# Altium PCB 数字电路.PcbDoc
Units mil, origin at the board's own origin, x right, y up, seen from the top; angles counter-clockwise.
Board outline 3550 x 3550 mil, 2 copper layers (Top Layer, Bottom Layer); 23 components, 13 nets, 137 pads, 0 vias.
Unrouted connection lines stored in the file: 47.
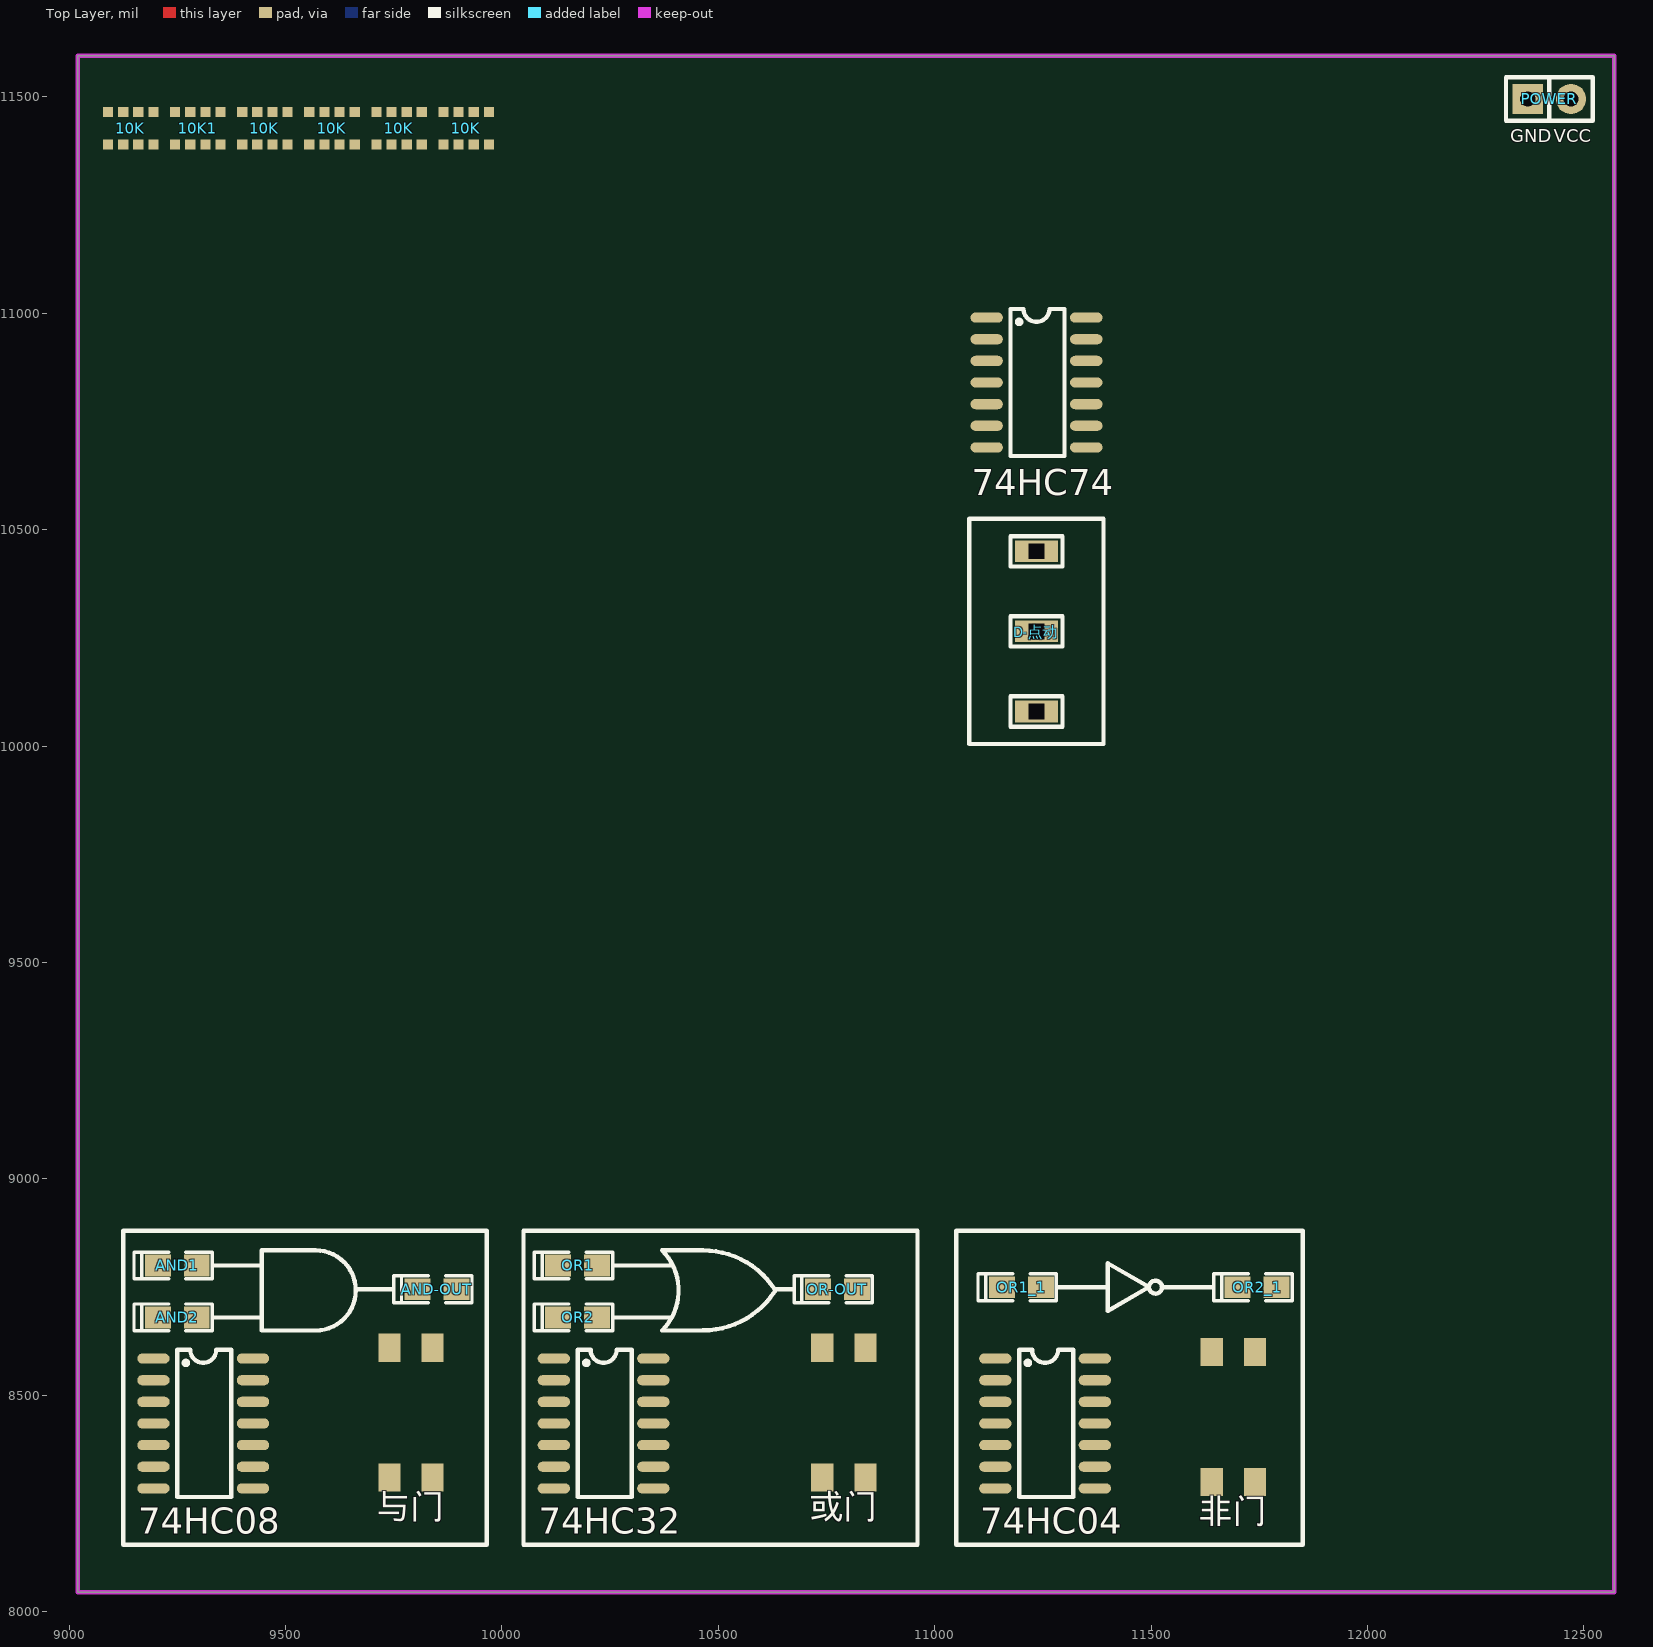
[diagram p0: Top Layer view]
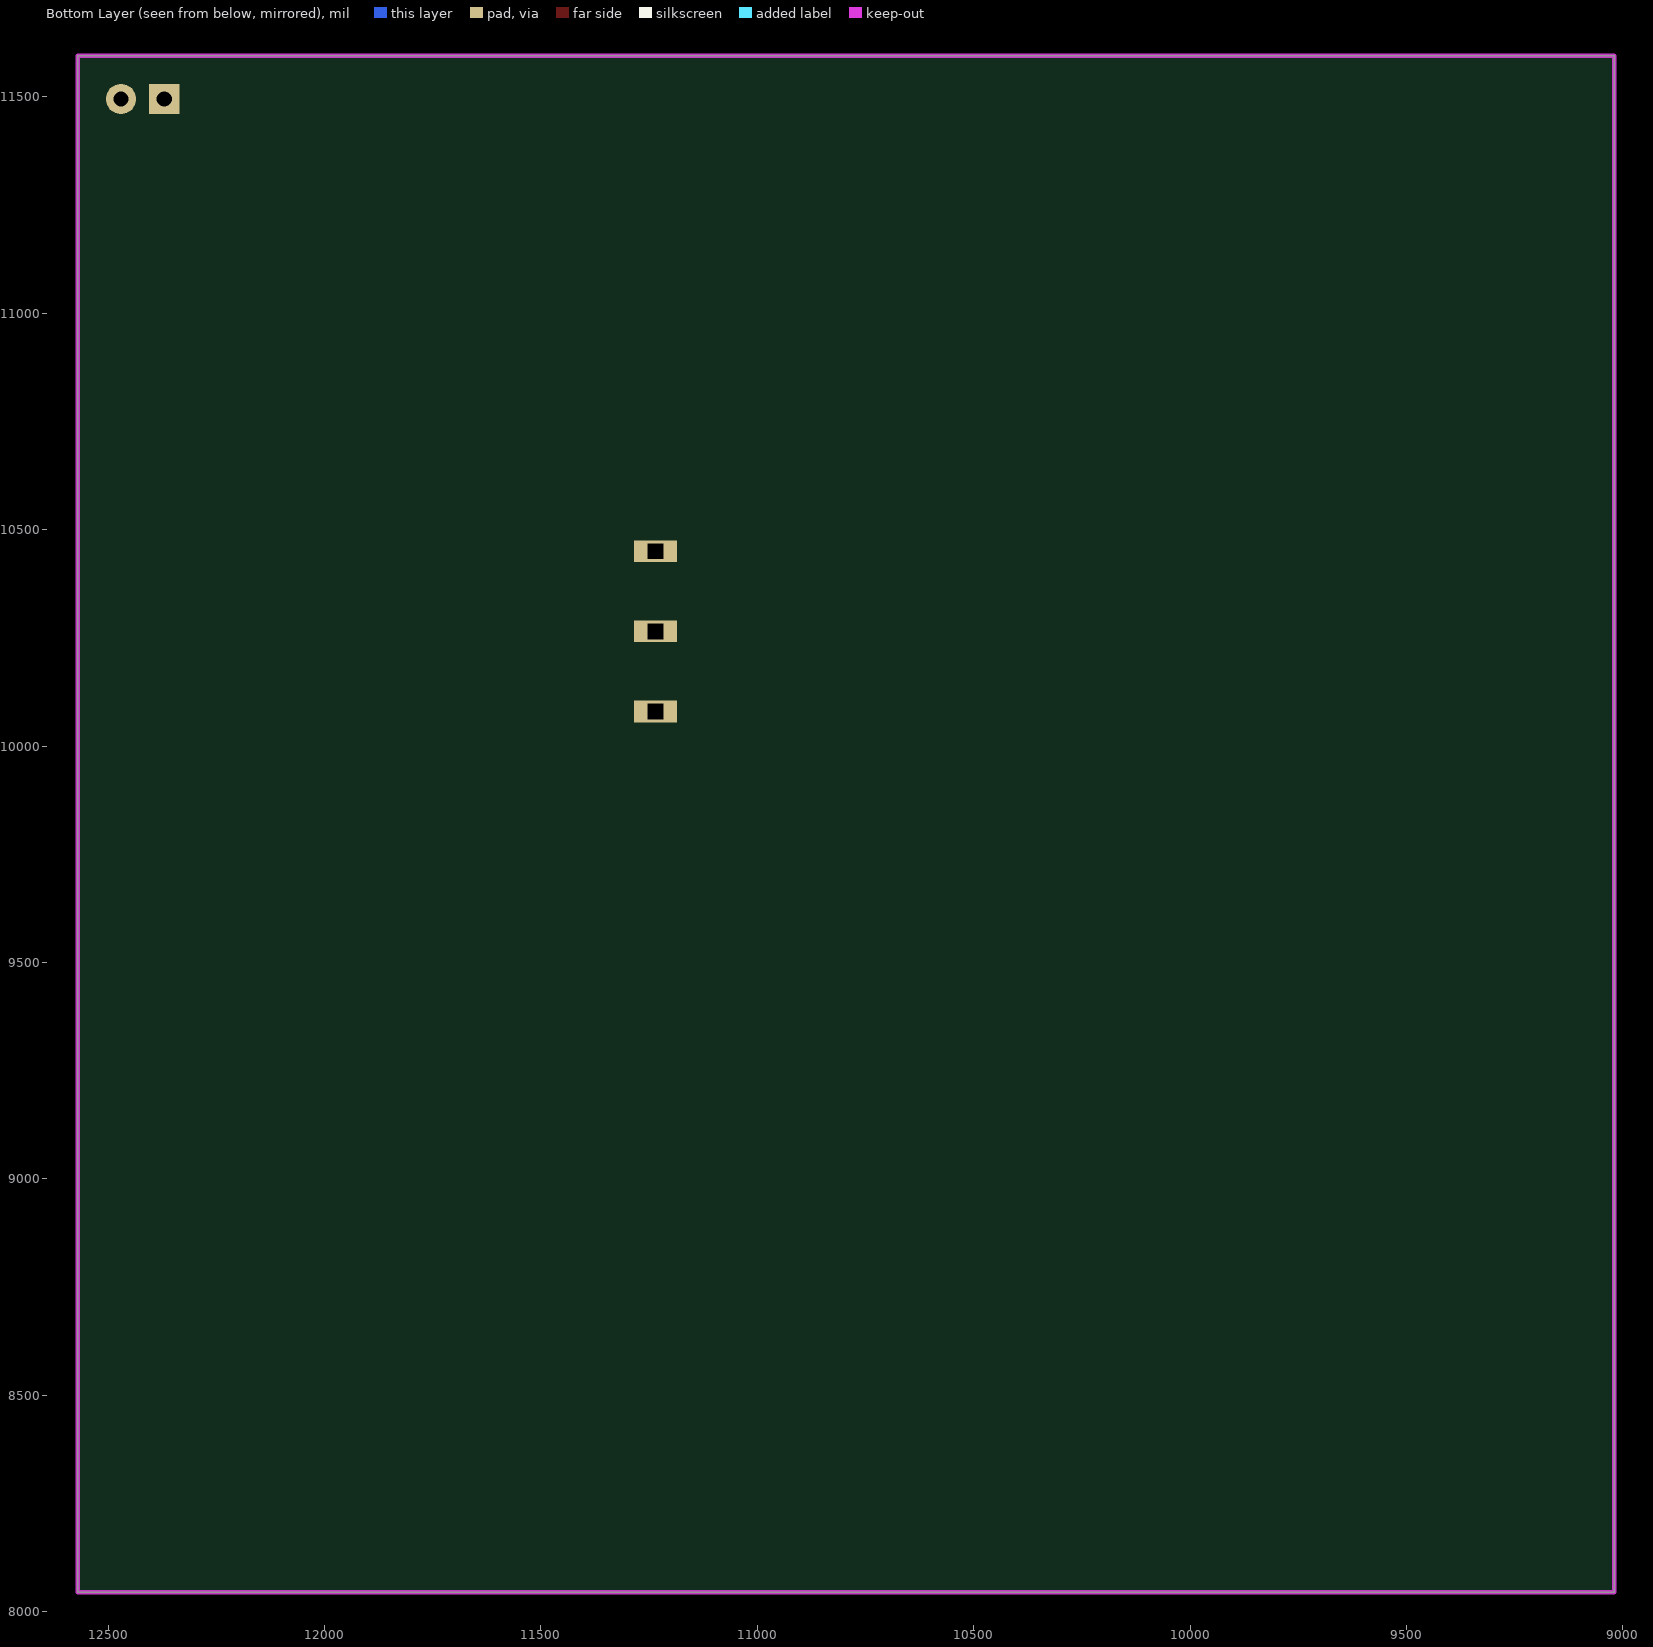
[diagram p1: Bottom Layer view, seen from below]

## Layer stack, top to bottom
Top Solder: solder mask 0.4, Solder Resist, Dk 3.5
Top Layer: signal copper 1.4
Dielectric 1: dielectric 12.6, FR-4, Dk 4.8
Bottom Layer: signal copper 1.4
Bottom Solder: solder mask 0.4, Solder Resist, Dk 3.5

## Board outline
9020,8045 12570,8045 12570,11595 9020,11595

## Design rules (kind name [scope] priority, off if disabled: settings)
Clearance [All] p1: gap=10
Height [All] p1: minheight=0 maxheight=1500 prefheight=500
PolygonConnect [All] p1: connectstyle=Relief reliefconductorwidth=10 reliefentries=4 polygonreliefangle="90 Angle" airgapwidth=10
RoutingVias [All] p1: holewidth=28 width=50 viastyle="Through Hole" minholewidth=28 minwidth=50 maxholewidth=28 maxwidth=50
SolderMaskExpansion [All] p1: expansion=4
Width [All] p1: maxlimit=10 minlimit=10 preferedwidth=10
29 further rules are at their usual default settings.

## Components (designator, comment, footprint, x,y, rotation, side; value= is the part's Value field where it differs from the comment)
10K "Comment" 排阻0603 9090,11395 r0 top
10K "Comment" 排阻0603 9400,11395 r0 top
10K "Comment" 排阻0603 9865,11395 r0 top
10K "Comment" 排阻0603 9710,11395 r0 top
10K "Comment" 排阻0603 9555,11395 r0 top
10K1 "Comment" 排阻0603 9245,11395 r0 top
74HC04 "Comment" 74HC04 11135,8265 r0 top
74HC08 "Comment" 74HC08 9190,8265 r0 top
74HC32 "Comment" 74HC08 10115,8265 r0 top
74HC74 "Comment" 74HC74 11115,10670 r0 top
AND1 "Comment" D0805 9295,8800 r180 top
AND2 "Comment" D0805 9295,8680 r180 top
AND-OUT "Comment" D0805 9895,8745 r180 top
D-点动 "Comment" 点动开关 11235,10265 r90 top
OR1 "Comment" D0805 10220,8800 r180 top
OR1_1 "Comment" D0805 11245,8750 r180 top
OR2 "Comment" D0805 10220,8680 r180 top
OR2_1 "Comment" D0805 11790,8750 r180 top
OR-OUT "Comment" D0805 10820,8745 r180 top
POWER "Comment" POWER 12370,11495 r0 top
与门 "Comment" 拨码开关2P 9740,8310 r0 top
或门 "Comment" 拨码开关2P 10740,8310 r0 top
非门 "Comment" 拨码开关2P 11640,8300 r0 top

## Footprints (in the part's own frame and the unit in brackets; to place one, negate y for a bottom-side part, rotate by r counter-clockwise, add the part's x,y. Pads: shape width x height; smd on the part's side, far side on the other; paste and mask are expansions set on the pad)
74HC04 [mil]
  oval 74.8x23.62 smd: 1A(5,320) 1Y(5,270) 2A(5,220) 2Y(5,170) 3A(5,120) 3Y(5,70) 4A(235,70) 4Y(235,20) 5A(235,170) 5Y(235,120) 6A(235,270) 6Y(235,220) GND(5,20) VCC(235,320)
  silkscreen extent 60,0 185,340, body extent -2,-1 242,341, height 63
74HC08 [mil]
  oval 74.8x23.62 smd: 1A(5,320) 1B(5,270) 1Y(5,220) 2A(5,170) 2B(5,120) 2Y(5,70) 3A(235,70) 3B(235,120) 3Y(235,20) 4A(235,220) 4B(235,270) 4Y(235,170) GND(5,20) VCC(235,320)
  silkscreen extent 60,0 185,340, body extent -2,-1 242,341, height 63
74HC74 [mil]
  oval 74.8x23.62 smd: 1CP(5,220) 1D(5,270) 1Q(5,120) 1Q'(5,70) 1RD'(5,320) 1SD'(5,170) 2CP(235,170) 2D(235,220) 2Q(235,70) 2Q'(235,20) 2RD'(235,270) 2SD'(235,120) GND(5,20) VCC(235,320)
  silkscreen extent 60,0 185,340, body extent -2,-1 242,341, height 63
D0805 [mil]
  rect 60x50 smd: +(0,0) GND(90,0)
  silkscreen extent -36,-31 145,31, body extent 5,-25 85,25, height 43
POWER [mil]
  rect 70x70 hole 35.43: GND(0,0)
  round 70 hole 35.43: VCC(100,0)
  silkscreen extent -50,-50 150,50, body extent -50,-50 150,50, height 336
拨码开关2P [mil]
  rect 51.18x65 smd: 1(0,300) 2(100,300) 11(0,0) 12(100,0)
  body extent -67,15 178,285, height 138
排阻0603 [mm]
  rect 0.6x0.6 smd: 1(0,1.778) 2(0,-0.127) 3(0.889,1.778) 4(0.889,-0.127) 5(1.778,1.778) 6(1.778,-0.127) 7(2.667,1.778) 8(2.667,-0.127)
  body extent -0.25,0 2.92,1.6, height 0.55
点动开关 [mm]
  rect 1.27x2.54 hole 0.9 square: 1(-4.699,0) 2(0,0) 3(4.699,0)
  silkscreen extent -6.6,-3.94 6.6,3.94, body extent -6.6,-5 6.6,5, height 27.6

## Nets (pads, with @x,y where several pads share a name; then routed paths per layer and width w, separated by ;. In a path a pad name is that pad's centre, name@x,y a point inside that pad or via, vN(x,y) a via of type N, cw(c..) or ccw(c..) an arc to the next point about the centre after c; other vN are vias at no path point)
AND1: 10K.2@9090,11390 74HC08.1A AND1.+ 与门.1
AND2: 10K.4@9125,11390 74HC08.1B AND2.+ 与门.2
ANDY: 10K.6@9160,11390 74HC08.1Y
GND: 74HC04.GND 74HC08.GND 74HC32.GND AND1.GND AND2.GND AND-OUT.GND OR1.GND OR1_1.GND OR2.GND OR2_1.GND OR-OUT.GND POWER.GND 与门.11 与门.12 或门.11 或门.12 非门.11 非门.12
LED-ANDY: 10K.5@9160,11465 AND-OUT.+
LED-NOTY: 10K1.7 OR2_1.+
LED-ORY: 10K.7@9195,11465 OR-OUT.+
NOTA: 10K1.6 74HC04.1A OR1_1.+ 非门.1
NOTY: 10K1.8 74HC04.1Y
OR1: 10K1.2 74HC32.1A OR1.+ 或门.1
OR2: 10K1.4 74HC32.1B OR2.+ 或门.2
ORY: 10K.8@9195,11390 74HC32.1Y
VCC: 10K1.1 10K1.3 10K1.5 10K.1@9090,11465 10K.1@9400,11465 10K.3@9125,11465 74HC04.VCC 74HC08.VCC 74HC32.VCC POWER.VCC
pads on no net: 10K.1@9555,11465 10K.1@9710,11465 10K.1@9865,11465 10K.2@9400,11390 10K.2@9555,11390 10K.2@9710,11390 10K.2@9865,11390 10K.3@9435,11465 10K.3@9590,11465 10K.3@9745,11465 10K.3@9900,11465 10K.4@9435,11390 10K.4@9590,11390 10K.4@9745,11390 10K.4@9900,11390 10K.5@9470,11465 10K.5@9625,11465 10K.5@9780,11465 10K.5@9935,11465 10K.6@9470,11390 10K.6@9625,11390 10K.6@9780,11390 10K.6@9935,11390 10K.7@9505,11465 10K.7@9660,11465 10K.7@9815,11465 10K.7@9970,11465 10K.8@9505,11390 10K.8@9660,11390 10K.8@9815,11390 10K.8@9970,11390 74HC04.2A 74HC04.2Y 74HC04.3A 74HC04.3Y 74HC04.4A 74HC04.4Y 74HC04.5A 74HC04.5Y 74HC04.6A 74HC04.6Y 74HC08.2A 74HC08.2B 74HC08.2Y 74HC08.3A 74HC08.3B 74HC08.3Y 74HC08.4A 74HC08.4B 74HC08.4Y 74HC32.2A 74HC32.2B 74HC32.2Y 74HC32.3A 74HC32.3B 74HC32.3Y 74HC32.4A 74HC32.4B 74HC32.4Y 74HC74.1CP 74HC74.1D 74HC74.1Q 74HC74.1Q' 74HC74.1RD' 74HC74.1SD' 74HC74.2CP 74HC74.2D 74HC74.2Q 74HC74.2Q' 74HC74.2RD' 74HC74.2SD' 74HC74.GND 74HC74.VCC D-点动.1 D-点动.2 D-点动.3 非门.2

## Keep-outs
Keep-Out Layer:
  the board outline again, w10

## Silkscreen, mask and mechanical layers (free items; w line width, h text height)
Top Overlay:
  circle w10: c11510,8750 r15
  lines w10: 9335,8680 9445,8680 ; 9335,8800 9445,8800 ; 9665,8745 9745,8745 ; 10260,8680 10390,8680 ; 10260,8800 10395,8800 ; 10464.74,8650 10370,8650 ccw(c10277.5,8742.5) 10370,8835 10465,8835 ; 10464.74,8650.13 ccw(c10464.74,8847.32) 10630.11,8739.93 ; 10464.74,8834.87 cw(c10464.74,8637.68) 10630.11,8745.07 ; 10635,8745 10670,8745 ; 11285,8750 11395,8750 ; 11530,8750 11640,8750 ; 9125,8155 9965,8155 9965,8880 9125,8880 9125,8155 ; 9445,8650 9445,8835 9570,8835 cw(c9570,8742.5) 9570,8650 9445,8650 ; 10050,8155 10960,8155 10960,8880 10050,8880 10050,8155 ; 11050,8155 11850,8155 11850,8880 11050,8880 11050,8155 ; 11400,8695 11400,8805 11495,8750 11400,8695
  text "GND" at 12330,11395 h30
  text "VCC" at 12430,11395 h30